# EAGLE board new_board1 (EAGLE 6.4)
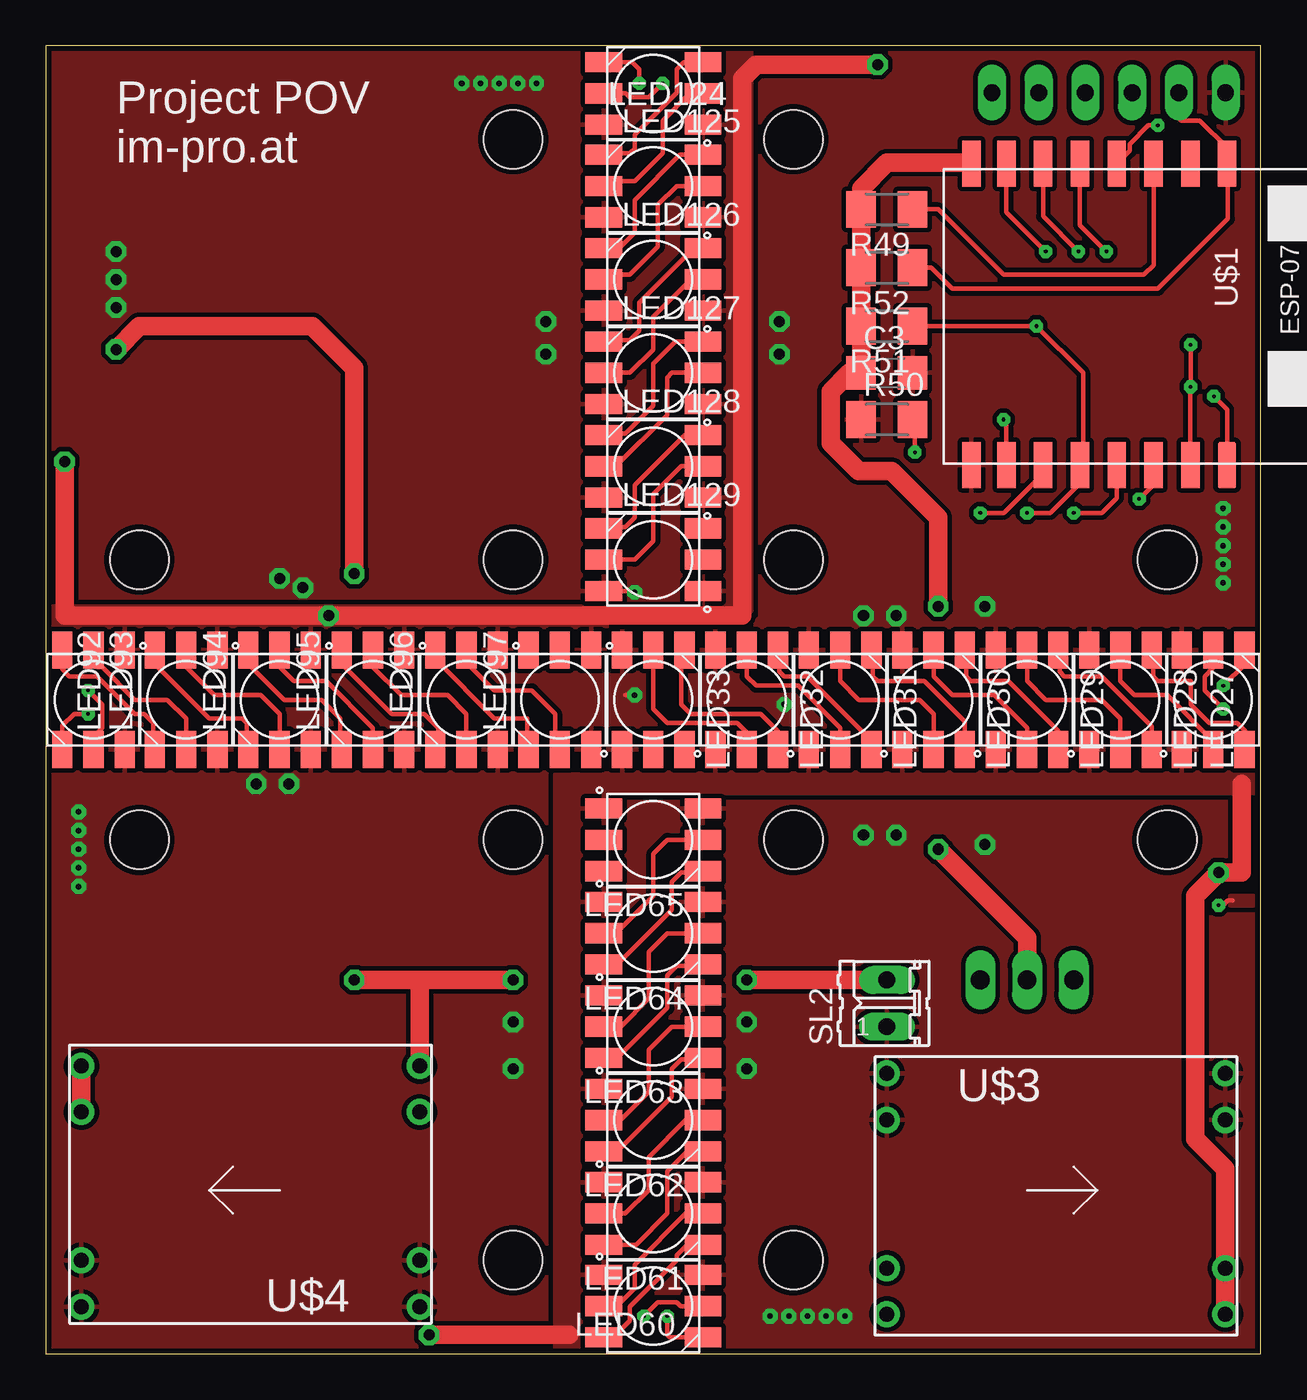
[diagram p0: board, top side]
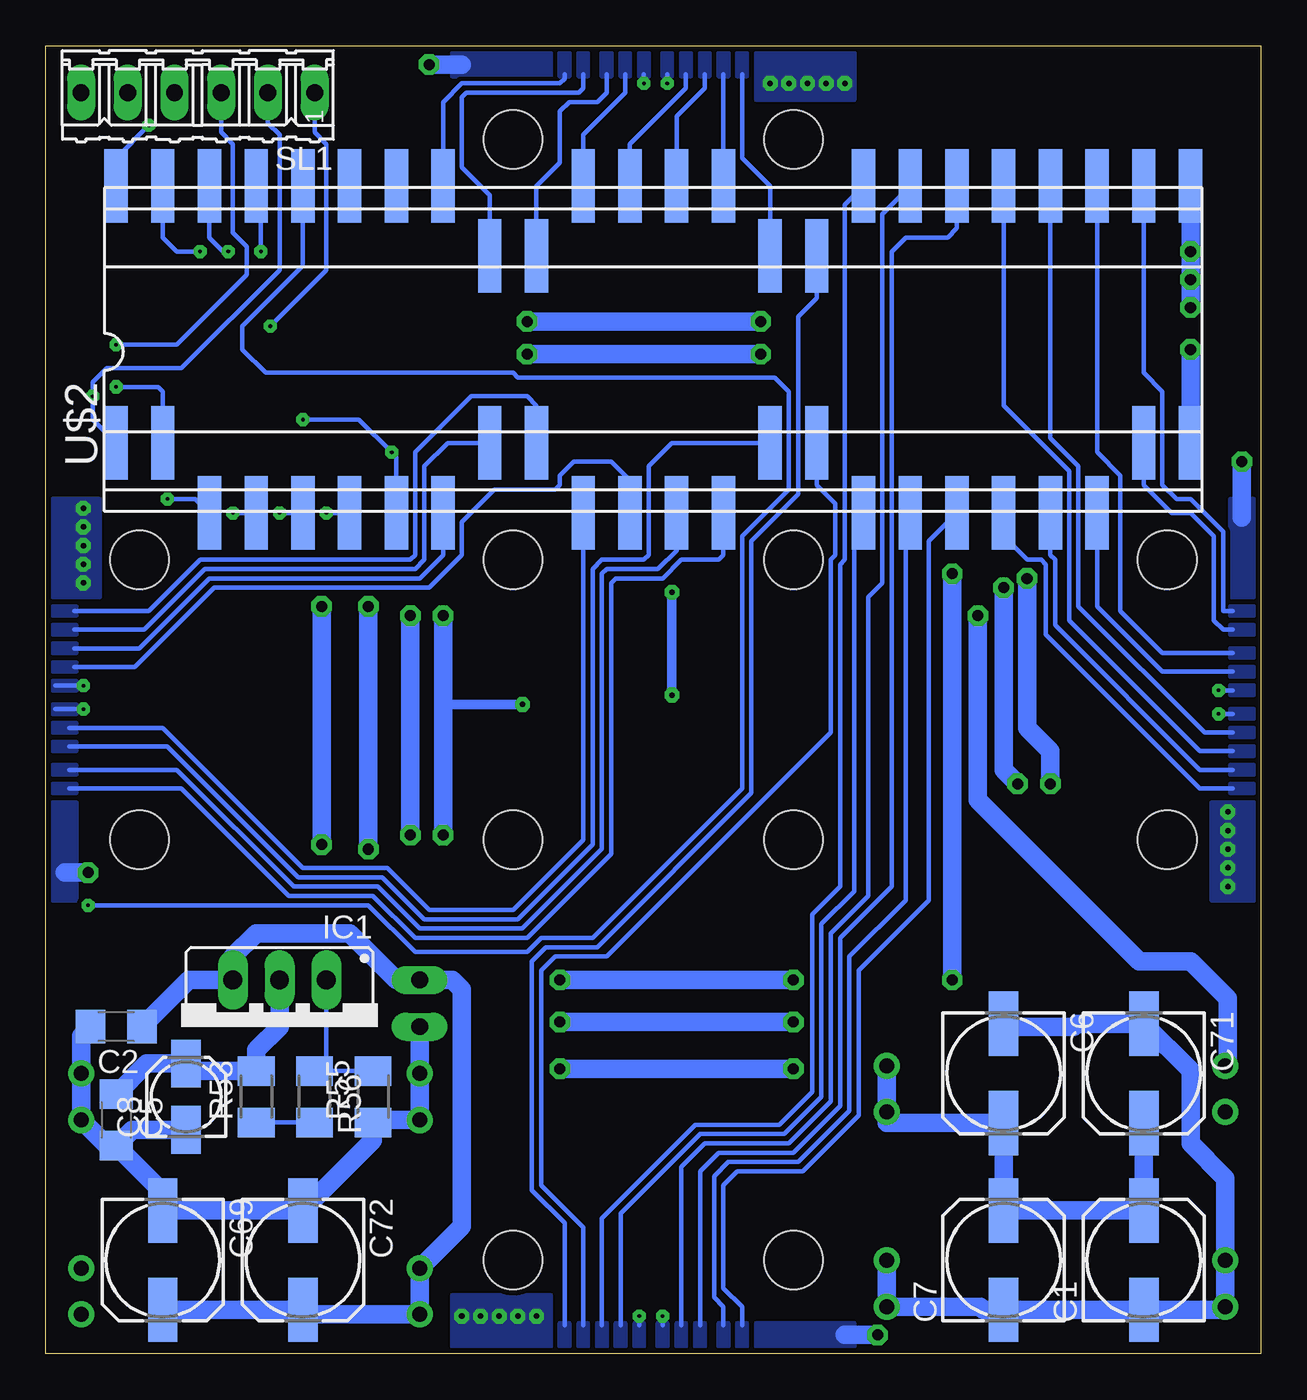
[diagram p1: board, bottom side, seen from below]

Size 66.04 x 71.12 mm. Coordinates in mm from the lower left corner, seen from the top.
Outline: 0,0 66.04,0 66.04,71.12 0,71.12 0,0
Copper layers (1*16): Top 0.035mm / dielectric 1.5mm / Bottom 0.035mm
Design rules "SparkFun *": minimum track width 10mil, minimum drill 0.2mm, track to track 10mil, track to pad 10mil, pad to pad 10mil, via to via 10mil, smd to smd 0mil, copper to edge 0.3mm, drill to drill 10mil, minimum pad ring 12mil, minimum via ring 10mil, stop-mask expansion 4mil, vias tented up to drill 20mil, thermal gap 10mil
Holes 3.2 mm at 25.4,43.18 40.64,43.18 40.64,27.94 25.4,27.94 60.96,43.18 60.96,27.94 5.08,43.18 5.08,27.94 25.4,5.08 40.64,5.08 25.4,66.04 40.64,66.04
tKeepout: area 22.6,25.2 to 28.1,30.7

## Footprints (pad centres in the part's own frame; a part is rotated, then mirrored left to right if it is on the bottom)
153CLV-0605 = smd 3.5 x 1.6: + 2.7,0; - -2.7,0
C1206 = smd 1.6 x 1.8: 1 -1.4,0; 2 1.4,0
153CLV-0405 = smd 2.6 x 1.6: + 1.8,0; - -1.8,0
317TS = drill 1.016 long: 1 -2.54,-2.54; 2 0,-2.54; 3 2.54,-2.54
APA102 = smd 2 x 1.1: CI -2.7,0; CO 2.7,0; DI -2.7,1.7; DO 2.7,1.7; GND -2.7,-1.7; VCC 2.7,-1.7
M1206 = smd 1.6 x 2: 1 -1.4,0; 2 1.4,0
06P = drill 0.914 long: 1 -6.35,0; 2 -3.81,0; 3 -1.27,0; 4 1.27,0; 5 3.81,0; 6 6.35,0
02P = drill 0.914 long: 1 -1.27,0; 2 1.27,0
ESP07-16PIN = smd 2.5 x 1: ADC -8.2,3.8; CH_PD -8.2,1.8; GND 8.2,-8.105; GPIO0 8.2,-2.2; GPIO2 8.2,-4.2; GPIO4 8.2,1.8; GPIO5 8.2,-0.2; GPIO12 -8.2,-4.2; GPIO13 -8.2,-6.2; GPIO14 -8.2,-2.2; GPIO15 8.2,-6.2; GPIO16 -8.2,-0.2; REST -8.2,5.8; RX 8.2,3.8; TX 8.2,5.8; VCC -8.2,-8.105
DIL48 = smd 1.27 x 4: P$1 -29.21,-5.08; P$2 -26.67,-5.08; P$3 -24.13,-8.89; P$4 -21.59,-8.89; P$5 -19.05,-8.89; P$6 -16.51,-8.89; P$7 -13.97,-8.89; P$8 -11.43,-8.89; P$9 -8.89,-5.08; P$10 -6.35,-5.08; P$11 -3.81,-8.89; P$12 -1.27,-8.89; P$13 1.27,-8.89; P$14 3.81,-8.89; P$15 6.35,-5.08; P$16 8.89,-5.08; P$17 11.43,-8.89; P$18 13.97,-8.89; P$19 16.51,-8.89; P$20 19.05,-8.89; P$21 21.59,-8.89; P$22 24.13,-8.89; P$23 26.67,-5.08; P$24 29.21,-5.08; P$25 29.21,8.89; P$26 26.67,8.89; P$27 24.13,8.89; P$28 21.59,8.89; P$29 19.05,8.89; P$30 16.51,8.89; P$31 13.97,8.89; P$32 11.43,8.89; P$33 8.89,5.08; P$34 6.35,5.08; P$35 3.81,8.89; P$36 1.27,8.89; P$37 -1.27,8.89; P$38 -3.81,8.89; P$39 -6.35,5.08; P$40 -8.89,5.08; P$41 -11.43,8.89; P$42 -13.97,8.89; P$43 -16.51,8.89; P$44 -19.05,8.89; P$45 -21.59,8.89; P$46 -24.13,8.89; P$47 -26.67,8.89; P$48 -29.21,8.89
DCDC = drill 0.813: GND1 0,0; GND2 0,-2.54; GND3 18.4,0; GND4 18.4,-2.54; VIN1 0,-10.6; VIN2 0,-13.1; VOUT1 18.4,-10.6; VOUT2 18.4,-13.1

## Placement (x,y rotation side)
C1  [153CLV-0605]  6.35,5.08 90 bottom
C2  [C1206]  62.23,17.78 180 bottom
C3  [C1206]  45.72,53.34 0 top
C5  [C1206]  62.23,12.7 270 bottom
C6  [153CLV-0605]  13.97,15.24 270 bottom
C7  [153CLV-0605]  13.97,5.08 90 bottom
C8  [153CLV-0405]  58.42,13.97 90 bottom
C69  [153CLV-0605]  59.69,5.08 270 bottom
C71  [153CLV-0605]  6.35,15.24 270 bottom
C72  [153CLV-0605]  52.07,5.08 270 bottom
IC1  [317TS]  53.34,17.78 180 bottom
LED27  APA102  [APA102]  63.46,35.56 270 top
LED28  APA102  [APA102]  58.42,35.56 270 top
LED29  APA102  [APA102]  53.34,35.56 270 top
LED30  APA102  [APA102]  48.26,35.56 270 top
LED31  APA102  [APA102]  43.18,35.56 270 top
LED32  APA102  [APA102]  38.1,35.56 270 top
LED33  APA102  [APA102]  33.02,35.56 270 top
LED60  APA102  [APA102]  33.02,2.58 180 top
LED61  APA102  [APA102]  33.02,7.62 180 top
LED62  APA102  [APA102]  33.02,12.7 180 top
LED63  APA102  [APA102]  33.02,17.78 180 top
LED64  APA102  [APA102]  33.02,22.86 180 top
LED65  APA102  [APA102]  33.02,27.94 180 top
LED92  APA102  [APA102]  2.58,35.56 90 top
LED93  APA102  [APA102]  7.62,35.56 90 top
LED94  APA102  [APA102]  12.7,35.56 90 top
LED95  APA102  [APA102]  17.78,35.56 90 top
LED96  APA102  [APA102]  22.86,35.56 90 top
LED97  APA102  [APA102]  27.94,35.56 90 top
LED124  APA102  [APA102]  33.02,68.54 0 top
LED125  APA102  [APA102]  33.02,63.5 0 top
LED126  APA102  [APA102]  33.02,58.42 0 top
LED127  APA102  [APA102]  33.02,53.34 0 top
LED128  APA102  [APA102]  33.02,48.26 0 top
LED129  APA102  [APA102]  33.02,43.18 0 top
R49  10k  [M1206]  45.72,62.23 180 top
R50  10k  [M1206]  45.72,50.8 0 top
R51  10k  [M1206]  45.72,55.88 180 top
R52  10k  [M1206]  45.72,59.05 180 top
R53  120R  [M1206]  54.61,13.97 90 bottom
R55  390R  [M1206]  48.26,13.97 90 bottom
R56  120R  [M1206]  51.44,13.97 270 bottom
SL1  [06P]  57.78,68.58 180 bottom
SL2  [02P]  45.72,19.05 90 top
U$1  ESP07-16PIN  [ESP07-16PIN]  58.42,56.52 270 top
U$2  CMODS6  [DIL48]  33.02,54.61 0 bottom
U$3  DCDC  [DCDC]  45.72,15.24 0 top
U$4  DCDC  [DCDC]  20.32,2.54 180 top

## Library data of the parts
C1-C3 C5-C8 C69 C71 C72 R49-R53 R55 R56 = rcl
IC1 = v-reg
LED27-LED33 LED60-LED65 LED92-LED97 LED124-LED129 = adafruit
SL1 SL2 = con-amp-quick; OC_FARNELL: unknown; OC_NEWARK: unknown
U$1 = esp8266modules; DIMENSIONS: 22.0 x 16.0 mm; PINS: 16; PITCH: 0.078" / 2 mm
U$2-U$4 = main

## Nets
+3V3: C3.1 C5.1 C8.+ IC1.2 R49.2 R51.2 R52.2 R53.2 U$1.VCC
+5V/1: LED27.VCC LED28.VCC LED29.VCC LED30.VCC LED31.VCC LED32.VCC LED33.VCC LED60.VCC LED61.VCC LED62.VCC LED63.VCC LED64.VCC LED65.VCC U$3.VOUT1 U$3.VOUT2
+5V/2: LED92.VCC LED93.VCC LED94.VCC LED95.VCC LED96.VCC LED97.VCC LED124.VCC LED125.VCC LED126.VCC LED127.VCC LED128.VCC LED129.VCC U$4.VOUT1 U$4.VOUT2
+12V: C1.+ C2.1 C6.+ C7.+ C69.+ C71.+ C72.+ IC1.3 SL2.2 U$2.P$24 U$3.VIN1 U$3.VIN2 U$4.VIN1 U$4.VIN2
GA1: U$2.P$8
GA2: U$2.P$9
GA3: U$2.P$10
GA4: U$2.P$11
GA5: U$2.P$12
GA6: U$2.P$13
GA7: U$2.P$14
GA8: U$2.P$15
GB1: U$2.P$33
GB2: U$2.P$32
GB3: U$2.P$31
GB4: U$2.P$30
GB5: U$2.P$16
GB6: U$2.P$17
GB7: U$2.P$18
GB8: U$2.P$19
GC1: U$2.P$29
GC2: U$2.P$28
GC3: U$2.P$27
GC4: U$2.P$26
GC5: U$2.P$20
GC6: U$2.P$21
GC7: U$2.P$22
GC8: U$2.P$23
GD1: U$2.P$41
GD2: U$2.P$40
GD3: U$2.P$39
GD4: U$2.P$38
GD5: U$2.P$37
GD6: U$2.P$36
GD7: U$2.P$35
GD8: U$2.P$34
GND: C1.- C2.2 C3.2 C5.2 C6.- C7.- C8.- C69.- C71.- C72.- LED27.GND LED28.GND LED29.GND LED30.GND LED31.GND LED32.GND LED33.GND LED60.GND LED61.GND LED62.GND LED63.GND LED64.GND LED65.GND LED92.GND LED93.GND LED94.GND LED95.GND LED96.GND LED97.GND LED124.GND LED125.GND LED126.GND LED127.GND LED128.GND LED129.GND R50.1 R55.1 SL1.6 SL2.1 U$1.GND U$2.P$25 U$3.GND1 U$3.GND2 U$3.GND3 U$3.GND4 U$4.GND1 U$4.GND2 U$4.GND3 U$4.GND4
GPIO0: R51.1 SL1.1 U$1.GPIO0 U$2.P$5
GPIO2: U$1.GPIO2 U$2.P$6
GPIO4: U$1.GPIO4 U$2.P$3
GPIO5: U$1.GPIO5 U$2.P$4
GPIO12: U$1.GPIO12 U$2.P$46
GPIO13: U$1.GPIO13 U$2.P$45
GPIO14: U$1.GPIO14 U$2.P$47
GPIO15: R50.2 U$1.GPIO15 U$2.P$7
GPIO16: U$1.GPIO16 U$2.P$48
N$1: U$2.P$44
N$83: R52.1 SL1.5 U$1.REST
N$84: R49.1 U$1.CH_PD
N$109: LED27.DI
N$112: LED27.CI
N$113: LED27.DO LED28.DI
N$114: LED27.CO LED28.CI
N$115: LED28.DO LED29.DI
N$116: IC1.1 R55.2 R56.1
N$117: LED28.CO LED29.CI
N$118: R53.1 R56.2
N$119: LED29.DO LED30.DI
N$120: LED29.CO LED30.CI
N$162: LED30.DO LED31.DI
N$163: LED30.CO LED31.CI
N$164: LED31.DO LED32.DI
N$165: LED31.CO LED32.CI
N$166: LED32.DO LED33.DI
N$167: LED32.CO LED33.CI
N$224: LED60.DI
N$225: LED60.CI
N$226: LED60.DO LED61.DI
N$227: LED60.CO LED61.CI
N$228: LED61.DO LED62.DI
N$229: LED61.CO LED62.CI
N$230: LED62.DO LED63.DI
N$231: LED62.CO LED63.CI
N$232: LED63.DO LED64.DI
N$233: LED63.CO LED64.CI
N$234: LED64.DO LED65.DI
N$235: LED64.CO LED65.CI
N$297: LED92.DI
N$298: LED92.CI
N$299: LED92.DO LED93.DI
N$300: LED92.CO LED93.CI
N$301: LED93.DO LED94.DI
N$302: LED93.CO LED94.CI
N$303: LED94.DO LED95.DI
N$304: LED94.CO LED95.CI
N$305: LED95.DO LED96.DI
N$306: LED95.CO LED96.CI
N$307: LED96.DO LED97.DI
N$308: LED96.CO LED97.CI
N$370: LED124.DI
N$371: LED124.CI
N$372: LED124.DO LED125.DI
N$373: LED124.CO LED125.CI
N$374: LED125.DO LED126.DI
N$375: LED125.CO LED126.CI
N$376: LED126.DO LED127.DI
N$377: LED126.CO LED127.CI
N$378: LED127.DO LED128.DI
N$379: LED127.CO LED128.CI
N$380: LED128.DO LED129.DI
N$381: LED128.CO LED129.CI
RX: SL1.3 U$1.RX U$2.P$2
TX: SL1.2 U$1.TX U$2.P$1

## Tracks (layer width: path | path; a pad name or v marks a point on that pad's centre or on a via)
+3V3  (via drill 0.6)
  Top 1: U$1.VCC 50.26,64.77 45.72,64.77 44.32,63.37 R49.2 R52.2 R51.2 C3.1 43.69,53.34 42.67,52.32 42.67,49.53 44.2,48.01 45.97,48.01 48.51,45.47 v48.51,40.64 | v48.51,27.43 53.34,22.61 IC1.2
  Bottom 1: IC1.2 53.34,17.78 54.61,16.51 R53.2 58.02,15.37 C8.+ 60.56,15.77 C5.1 | v48.51,27.43 v48.51,40.64
+5V/1  (via drill 0.6)
  Top 1: U$3.VOUT2 U$3.VOUT1 64.12,10.05 62.48,11.68 62.48,24.89 v63.75,26.16 65.02,26.16 65.02,30.99 | v20.83,1.02 28.45,1.02
  Bottom 1: v20.83,1.02 22.61,1.02 | 65.02,26.16 v63.75,26.16
  pour Bottom: 65.66,29.97 64.39,29.97 64.39,24.64 65.66,24.64
  pour Bottom: 27.43,0.38 27.43,1.65 22.1,1.65 22.1,0.38
  pour Top: 30.48,33.02 66.04,33.02 66.04,30.48 30.48,30.48
  pour Top: 27.69,0 27.69,31.5 30.48,31.5 30.48,0
+5V/2  (via drill 0.6)
  Top 1: U$4.VOUT1 U$4.VOUT2 | v1.02,48.51 1.02,40.13 37.85,40.13 37.85,69.34 38.61,70.1 v45.21,70.1
  Bottom 1: v1.02,48.51 1.02,45.47 | v45.21,70.1 43.43,70.1 | U$4.VOUT2 1.78,15.78 1.78,19.3 3.81,21.34 6.6,21.34 15.37,30.1 v15.37,40.13
  pour Bottom: 0.38,41.15 1.65,41.15 1.65,46.48 0.38,46.48
  pour Bottom: 38.61,70.74 38.61,69.47 43.94,69.47 43.94,70.74
  pour Top: 30.48,38.35 0,38.35 0,40.64 30.48,40.64
  pour Top: 38.35,70.87 38.35,40.39 35.81,40.39 35.81,70.87
+12V  (via drill 0.6)
  Top 1: v38.1,20.32 SL2.2 | v3.81,54.61 5.08,55.88 14.48,55.88 16.76,53.59 v16.76,42.42 | 20.32,20.32 U$4.VIN2 | 55.63,20.07 IC1.3 | v16.76,20.32 20.32,20.32 | 20.32,20.32 v25.4,20.32
  Bottom 1: C71.+ C1.+ C7.+ C6.+ 20.32,12.54 U$4.VIN1 U$4.VIN2 | v25.4,20.32 v38.1,20.32 | C2.1 58.29,20.32 IC1.3 55.88,21.59 54.61,22.86 49.53,22.86 46.99,20.32 SL2.2 43.94,20.32 43.43,19.81 43.43,6.93 U$3.VIN1 U$3.VIN2 51.83,2.14 C72.+ C69.+ | v16.76,20.32 v16.76,42.42 | v3.81,54.61 U$2.P$24
GA1
  Bottom 0.254: U$2.P$8 44.45,43.43 45.72,42.16 57.15,42.16 60.96,38.35 64.52,38.35
  pour Bottom: 64.39,38.61 65.66,38.61 65.66,38.1 64.39,38.1
GA2
  Bottom 0.254: U$2.P$9 44.2,49.53 45.47,48.26 45.47,43.18 45.97,42.67 57.4,42.67 60.71,39.37 64.52,39.37
  pour Bottom: 64.39,39.62 65.66,39.62 65.66,39.12 64.39,39.12
GA3
  Bottom 0.254: U$2.P$10 39.37,51.56 39.88,52.07 42.93,52.07 45.97,49.02 45.97,43.43 46.23,43.18 57.66,43.18 60.45,40.39 64.52,40.39
  pour Bottom: 64.39,40.64 65.66,40.64 65.66,40.13 64.39,40.13
GA4
  Bottom 0.254: U$2.P$11 36.83,27.94 40.64,24.13 45.21,24.13 47.5,26.42 52.07,26.42 59.69,34.04 64.77,34.04
  pour Bottom: 64.39,34.29 65.66,34.29 65.66,33.78 64.39,33.78
GA5
  Bottom 0.254: U$2.P$12 34.29,47.5 35.31,48.51 37.34,48.51 38.1,47.75 38.1,47.24 38.35,46.99 41.66,46.99 43.43,45.21 43.43,43.43 45.21,41.66 56.9,41.66 61.21,37.34 64.52,37.34
  pour Bottom: 64.39,37.59 65.66,37.59 65.66,37.08 64.39,37.08
GA6
  Bottom 0.254: 64.77,31.75 58.93,31.75 52.58,25.4 48.01,25.4 45.72,23.11 40.13,23.11 35.81,27.43 35.81,42.42 35.56,42.67 32.77,42.67 31.75,43.69 U$2.P$13
  pour Bottom: 64.39,32 65.66,32 65.66,31.5 64.39,31.5
GA7
  Bottom 0.254: 64.77,30.73 58.67,30.73 52.83,24.89 48.26,24.89 45.97,22.61 39.88,22.61 35.31,27.18 35.31,41.91 35.05,42.16 32.51,42.16 31.5,43.18 29.46,43.18 29.21,43.43 U$2.P$14
  pour Bottom: 64.39,30.99 65.66,30.99 65.66,30.48 64.39,30.48
GA8
  Bottom 0.254: U$2.P$15 32,49.53 33.27,48.26 33.27,43.43 33.53,43.18 35.81,43.18 36.32,42.67 36.32,27.69 40.39,23.62 45.47,23.62 47.75,25.91 52.32,25.91 59.44,33.02 64.77,33.02
  pour Bottom: 64.39,33.27 65.66,33.27 65.66,32.77 64.39,32.77
GB1
  Bottom 0.254: 37.85,1.52 37.85,7.11 39.62,8.89 39.62,21.34 38.86,22.1 36.07,22.1 27.69,30.48 27.69,44.2 25.15,46.74 25.15,56.39 24.13,57.4 24.13,58.93 24.51,59.31 U$2.P$33
  pour Bottom: 38.1,1.65 38.1,0.38 37.59,0.38 37.59,1.65
GB2
  Bottom 0.254: U$2.P$32 22.61,62.48 22.61,43.18 22.86,42.93 22.86,25.4 24.38,23.88 24.38,14.22 26.16,12.45 30.73,12.45 35.81,7.37 35.81,1.52
  pour Bottom: 36.07,1.65 36.07,0.38 35.56,0.38 35.56,1.65
GB3
  Bottom 0.254: U$2.P$31 20.57,61.98 20.57,41.91 21.34,41.15 21.34,24.89 23.37,22.86 23.37,13.72 25.65,11.43 30.23,11.43 31.5,10.16 31.5,1.52
  pour Bottom: 31.75,1.65 31.75,0.38 31.24,0.38 31.24,1.65
GB4
  Bottom 0.254: 30.48,1.52 30.48,9.91 29.46,10.92 25.4,10.92 22.86,13.46 22.86,22.61 20.07,25.4 20.07,59.94 19.3,60.71 17.02,60.71 16.51,61.21 U$2.P$30
  pour Bottom: 30.73,1.65 30.73,0.38 30.23,0.38 30.23,1.65
GB5
  Bottom 0.254: 36.83,1.52 36.83,6.86 39.12,9.14 39.12,20.83 38.35,21.59 35.56,21.59 23.37,33.78 23.37,43.18 23.11,43.43 23.11,46.23 24.13,47.24 U$2.P$16
  pour Bottom: 37.08,1.65 37.08,0.38 36.58,0.38 36.58,1.65
GB6
  Bottom 0.254: U$2.P$17 22.1,45.21 22.1,25.15 23.88,23.37 23.88,13.97 25.91,11.94 30.48,11.94 34.8,7.62 34.8,1.52
  pour Bottom: 35.05,1.65 35.05,0.38 34.54,0.38 34.54,1.65
GB7
  Bottom 0.254: U$2.P$18 19.3,45.47 19.3,24.64 22.35,21.59 22.35,13.21 25.15,10.41 28.96,10.41 29.72,9.65 29.72,3.05 29.21,2.54 29.21,1.52
  pour Bottom: 29.46,1.65 29.46,0.38 28.96,0.38 28.96,1.65
GB8
  Bottom 0.254: U$2.P$19 18.03,44.2 18.03,24.64 21.84,20.83 21.84,12.95 24.89,9.91 28.45,9.91 29.21,9.14 29.21,3.56 28.19,2.54 28.19,1.52
  pour Bottom: 28.45,1.65 28.45,0.38 27.94,0.38 27.94,1.65
GC1
  Bottom 0.254: U$2.P$29 13.97,51.56 10.41,48.01 10.41,39.88 3.3,32.77 1.52,32.77
  pour Bottom: 1.65,32.51 0.38,32.51 0.38,33.02 1.65,33.02
GC2
  Bottom 0.254: U$2.P$28 11.43,49.78 9.91,48.26 9.91,40.64 3.05,33.78 1.52,33.78
  pour Bottom: 1.65,33.53 0.38,33.53 0.38,34.04 1.65,34.04
GC3
  Bottom 0.254: U$2.P$27 8.89,49.02 7.62,47.75 7.62,40.39 5.33,38.1 1.52,38.1
  pour Bottom: 1.65,37.85 0.38,37.85 0.38,38.35 1.65,38.35
GC4
  Bottom 0.254: U$2.P$26 6.35,53.34 5.33,52.32 5.33,47.24 4.57,46.48 3.81,46.48 2.03,44.7 2.03,40.39 1.52,40.39
  pour Bottom: 1.65,40.13 0.38,40.13 0.38,40.64 1.65,40.64
GC5
  Bottom 0.254: U$2.P$20 13.97,44.45 12.7,43.18 11.94,43.18 11.68,42.93 11.68,39.12 3.3,30.73 1.52,30.73
  pour Bottom: 1.65,30.48 0.38,30.48 0.38,30.99 1.65,30.99
GC6
  Bottom 0.254: U$2.P$21 11.43,43.43 11.18,43.18 11.18,39.62 3.3,31.75 1.52,31.75
  pour Bottom: 1.65,31.5 0.38,31.5 0.38,32 1.65,32
GC7
  Bottom 0.254: U$2.P$22 8.89,40.64 5.33,37.08 1.52,37.08
  pour Bottom: 1.65,36.83 0.38,36.83 0.38,37.34 1.65,37.34
GC8
  Bottom 0.254: U$2.P$23 6.35,47.24 4.83,45.72 3.81,45.72 2.54,44.45 2.54,39.88 2.03,39.37 1.52,39.37
  pour Bottom: 1.65,39.12 0.38,39.12 0.38,39.62 1.65,39.62
GD1
  Bottom 0.254: U$2.P$41 44.45,68.07 43.43,69.09 38.1,69.09 37.85,69.34 37.85,69.6
  pour Bottom: 37.59,69.47 37.59,70.74 38.1,70.74 38.1,69.47
GD2
  Bottom 0.254: U$2.P$40 41.91,62.99 43.43,64.52 43.43,68.33 43.18,68.58 37.08,68.58 36.83,68.83 36.83,69.6
  pour Bottom: 36.58,69.47 36.58,70.74 37.08,70.74 37.08,69.47
GD3
  Bottom 0.254: U$2.P$39 39.37,63.5 38.1,64.77 38.1,67.56 37.59,68.07 36.07,68.07 35.56,68.58 35.56,69.6
  pour Bottom: 35.31,69.47 35.31,70.74 35.81,70.74 35.81,69.47
GD4
  Bottom 0.254: U$2.P$38 36.83,66.29 34.54,68.58 34.54,69.6
  pour Bottom: 34.29,69.47 34.29,70.74 34.8,70.74 34.8,69.47
GD5
  Bottom 0.254: U$2.P$37 34.29,65.79 31.24,68.83 31.24,69.6
  pour Bottom: 30.99,69.47 30.99,70.74 31.5,70.74 31.5,69.47
GD6
  Bottom 0.254: U$2.P$36 31.75,67.31 30.23,68.83 30.23,69.6
  pour Bottom: 29.97,69.47 29.97,70.74 30.48,70.74 30.48,69.47
GD7
  Bottom 0.254: U$2.P$35 29.21,69.6
  pour Bottom: 28.96,69.47 28.96,70.74 29.46,70.74 29.46,69.47
GD8
  Bottom 0.254: U$2.P$34 26.67,63.5 28.19,65.02 28.19,69.6
  pour Bottom: 27.94,69.47 27.94,70.74 28.45,70.74 28.45,69.47
GND  (via drill 0.3, 0.6)
  Top 0.254: C3.2 46.86,53.34 | LED129.GND 31.93,41.48 v32,41.4 | v32,35.81 31.5,35.81
  Bottom 0.508: v32,41.4 v32,35.81 | v40.13,35.31 44.2,35.31 44.45,35.56
  Bottom 1: 6.19,2.54 C1.- | C1.- C7.- 15.08,2.38 15.24,2.54 U$4.GND1 U$4.GND2 | C5.2 59.69,8.76 C69.- C72.- 48.26,11.59 R55.1 48.13,12.7 U$3.GND2 U$3.GND1 SL2.1 | C5.2 62.72,11.3 U$3.GND4 U$3.GND3 64.12,17.29 C2.2 | C8.- 61.36,12.17 C5.2 | U$2.P$25 v3.81,58.42 v3.81,56.9 | v25.4,15.49 v38.1,15.49 | v25.4,18.03 v38.1,18.03 | v44.45,40.13 44.45,35.56 v44.45,28.19 | C1.- 2.08,2.38 U$4.GND3 U$4.GND4 1.92,9.54 3.81,11.43 3.81,15.4 C71.- 10,17.94 10.16,17.78 13.81,17.78 C6.- | v51.05,40.64 v51.05,27.69 | v46.23,40.13 v46.23,28.19 | v12.7,42.16 12.7,34.04 11.43,32.77 v11.43,30.99 | v13.97,41.66 13.97,31.75 v13.21,30.99 | v39.88,56.13 v27.18,56.13 | v27.18,54.36 v39.88,54.36
  other vias: 64.01,45.97 64.01,44.96 64.01,43.94 64.01,42.93 64.01,41.91 43.43,2.03 42.42,2.03 41.4,2.03 40.39,2.03 39.37,2.03 1.78,25.4 1.78,26.42 1.78,27.43 1.78,28.45 1.78,29.46 22.61,69.09 23.62,69.09 24.64,69.09 25.65,69.09 26.67,69.09 3.81,59.94
  pour Top (rank 3): 66.04,71.12 66.04,0 0,0 0,71.12
  pour Bottom: 65.66,41.15 63.12,41.15 63.12,46.48 65.66,46.48
  pour Bottom: 38.61,0.38 38.61,3.17 43.94,3.17 43.94,0.38
  pour Bottom: 0.38,29.97 2.67,29.97 2.67,24.64 0.38,24.64
  pour Bottom: 27.43,70.74 27.43,68.2 22.1,68.2 22.1,70.74
GPIO0  (via drill 0.2)
  Top 0.254: v53.34,45.72 54.61,45.72 56.22,47.33 U$1.GPIO0 56.39,48.48 56.39,53.34 v53.85,55.88 R51.1
  Bottom 0.254: v53.34,45.72 U$2.P$5 | SL1.1 51.44,66.42 50.8,65.79 50.8,58.93 v53.85,55.88
GPIO2  (via drill 0.2)
  Top 0.254: U$1.GPIO2 54.22,47.87 52.07,45.72 v50.8,45.72
  Bottom 0.254: v50.8,45.72 U$2.P$6
GPIO4  (via drill 0.2)
  Top 0.254: U$1.GPIO4 60.22,47.27 v59.44,46.48
  Bottom 0.254: v59.44,46.48 57.91,46.48 U$2.P$3
GPIO5  (via drill 0.2)
  Top 0.254: U$1.GPIO5 58.22,46.54 57.4,45.72 v55.88,45.72
  Bottom 0.254: v55.88,45.72 U$2.P$4
GPIO12  (via drill 0.2)
  Top 0.254: U$1.GPIO12 54.22,61.86 v56.13,59.94
  Bottom 0.254: v56.13,59.94 56.39,59.94 57.15,60.71 U$2.P$46
GPIO13  (via drill 0.2)
  Top 0.254: U$1.GPIO13 52.22,62.08 v54.36,59.94
  Bottom 0.254: v54.36,59.94 54.36,63.25 U$2.P$45
GPIO14  (via drill 0.2)
  Top 0.254: U$1.GPIO14 56.22,61.38 v57.66,59.94
  Bottom 0.254: v57.66,59.94 58.93,59.94 59.69,60.71 U$2.P$47
GPIO15  (via drill 0.2)
  Top 0.254: R50.2 47.24,50.68 v47.24,49.02 | v52.07,50.8 52.22,50.65 U$1.GPIO15
  Bottom 0.254: U$2.P$7 46.99,48.77 v47.24,49.02 49.02,50.8 v52.07,50.8
GPIO16  (via drill 0.2)
  Top 0.254: v60.45,66.8 59.94,66.8 58.93,65.79 58.93,65.42 U$1.GPIO16
  Bottom 0.254: U$2.P$48 62.23,65.02 v60.45,66.8
N$1  (via drill 0.2)
  Top 0.254: v63.75,24.38 64.01,24.38 64.26,24.64 64.52,24.64
  Bottom 0.254: U$2.P$44 52.07,59.18 55.37,55.88 55.37,54.61 54.1,53.34 40.64,53.34 40.39,53.09 26.42,53.09 25.65,52.32 25.65,46.99 28.19,44.45 28.19,30.73 36.32,22.61 39.12,22.61 39.88,21.84 45.97,21.84 48.51,24.38 v63.75,24.38
  pour Top: 65.66,24.38 64.39,24.38 64.39,24.89 65.66,24.89
N$83
  Top 0.254: SL1.5 61.47,68.45 61.47,67.31 61.72,67.06 62.74,67.06 64.22,65.57 U$1.REST 64.26,64.67 64.26,61.72 60.45,57.91 49.28,57.91 48.13,59.05 R52.1
N$84
  Top 0.254: U$1.CH_PD 60.22,59.2 59.69,58.67 52.07,58.67 48.51,62.23 R49.1
N$109  (via drill 0.2)
  Top 0.254: LED27.DI 65.2,37.51 v64.01,36.32
  Bottom 0.254: v64.01,36.32 65.53,36.32
  pour Bottom: 64.39,36.58 65.66,36.58 65.66,36.07 64.39,36.07
N$112  (via drill 0.2)
  Top 0.254: LED27.CI 63.5,37.34 62.99,36.83 62.99,36.07 v64.01,35.05
  Bottom 0.254: v64.01,35.05 65.53,35.05
  pour Bottom: 64.39,35.31 65.66,35.31 65.66,34.8 64.39,34.8
N$113
  Top 0.254: LED27.DO 65.2,33.86 64.77,34.29 63.25,34.29 62.23,35.31 62.23,36.58 60.45,36.58 60.2,36.83 60.2,38.18 LED28.DI
N$114
  Top 0.254: LED28.CI 58.42,36.58 59.18,35.81 60.96,35.81 63.5,33.27 LED27.CO
N$115
  Top 0.254: LED28.DO 60.12,34.11 57.4,36.83 55.37,36.83 55.12,37.08 55.12,38.18 LED29.DI
N$116
  Bottom 0.254: IC1.1 50.8,16 R56.1 R55.2
N$117
  Top 0.254: LED28.CO 58.42,34.54 57.4,35.56 54.36,35.56 53.34,36.58 LED29.CI
N$118
  Bottom 0.254: R56.2 R53.1
N$119
  Top 0.254: LED29.DO 55.04,33.86 52.32,36.58 50.29,36.58 50.04,36.83 50.04,38.18 LED30.DI
N$120
  Top 0.254: LED29.CO 53.34,34.04 51.56,35.81 49.28,35.81 48.26,36.83 LED30.CI
N$162
  Top 0.254: LED30.DO 49.96,34.37 47.75,36.58 45.21,36.58 44.96,36.83 44.96,38.18 LED31.DI
N$163
  Top 0.254: LED30.CO 48.26,34.8 47.5,35.56 44.2,35.56 43.18,36.58 LED31.CI
N$164
  Top 0.254: LED31.DO 44.88,33.35 41.4,36.83 40.13,36.83 39.88,37.08 39.88,38.18 LED32.DI
N$165
  Top 0.254: LED31.CO 43.18,34.04 40.89,36.32 38.61,36.32 38.1,36.83 LED32.CI
N$166
  Top 0.254: LED33.DI 34.54,38.08 34.54,35.31 35.05,34.8 38.86,34.8 39.8,33.86 LED32.DO
N$167
  Top 0.254: LED33.CI 33.02,35.05 33.78,34.29 37.59,34.29 38.1,33.78 LED32.CO
N$224  (via drill 0.2)
  Top 0.254: LED60.DI 33.92,0.88 33.78,1.02 v33.78,2.03
  Bottom 0.254: v33.78,2.03 33.78,1.52
  pour Bottom: 34.04,1.65 34.04,0.38 33.53,0.38 33.53,1.65
N$225  (via drill 0.2)
  Top 0.254: LED60.CI 34.5,2.58 34.29,2.79 33.27,2.79 v32.51,2.03
  Bottom 0.254: v32.51,2.03 32.51,1.52
  pour Bottom: 32.77,1.65 32.77,0.38 32.26,0.38 32.26,1.65
N$226
  Top 0.254: LED60.DO 30.85,0.88 31.75,1.78 31.75,2.54 34.29,5.08 34.29,5.33 34.8,5.84 35.64,5.84 LED61.DI
N$227
  Top 0.254: LED60.CO 31.03,2.58 32,3.56 32,4.83 34.8,7.62 LED61.CI
N$228
  Top 0.254: LED61.DO 32.08,5.92 33.78,7.62 33.78,9.91 34.8,10.92 35.64,10.92 LED62.DI
N$229
  Top 0.254: LED61.CO 31.5,7.62 32.77,8.89 32.77,10.67 34.8,12.7 LED62.CI
N$230
  Top 0.254: LED62.DO 31.07,11 34.04,13.97 34.04,15.49 34.54,16 35.64,16 LED63.DI
N$231
  Top 0.254: LED62.CO 31.24,12.7 32.77,14.22 32.77,16.51 34.04,17.78 LED63.CI
N$232
  Top 0.254: LED63.DO 31.07,16.08 33.78,18.8 33.78,20.57 34.29,21.08 35.64,21.08 LED64.DI
N$233
  Top 0.254: LED63.CO 31.24,17.78 32.77,19.3 32.77,21.84 33.78,22.86 LED64.CI
N$234
  Top 0.254: LED64.DO 31.07,21.16 34.04,24.13 34.04,25.65 34.54,26.16 35.64,26.16 LED65.DI
N$235
  Top 0.254: LED64.CO 30.99,22.86 33.02,24.89 33.02,27.18 33.78,27.94 LED65.CI
N$297  (via drill 0.2)
  Top 0.254: LED92.DI 0.88,34.15 1.52,34.8 v2.29,34.8
  Bottom 0.254: v2.29,34.8 1.52,34.8
  pour Bottom: 1.65,34.54 0.38,34.54 0.38,35.05 1.65,35.05
N$298  (via drill 0.2)
  Top 0.254: v2.29,36.07 3.05,35.31 3.05,34.04 2.58,33.57 LED92.CI
  Bottom 0.254: v2.29,36.07 1.52,36.07
  pour Bottom: 1.65,35.81 0.38,35.81 0.38,36.32 1.65,36.32
N$299
  Top 0.254: LED92.DO 0.88,37.22 1.27,36.83 2.79,36.83 4.83,34.8 5.33,34.8 5.84,34.29 5.84,32.94 LED93.DI
N$300
  Top 0.254: LED92.CO 2.58,37.55 2.79,37.34 3.05,37.34 4.83,35.56 6.6,35.56 7.62,34.54 LED93.CI
N$301
  Top 0.254: LED93.DO 5.92,37.51 8.89,34.54 10.67,34.54 10.92,34.29 10.92,32.94 LED94.DI
N$302
  Top 0.254: LED93.CO 7.62,37.34 9.14,35.81 11.68,35.81 12.7,34.8 LED94.CI
N$303
  Top 0.254: LED94.DO 11,37.51 12.95,35.56 14.99,35.56 16,34.54 16,32.94 LED95.DI
N$304
  Top 0.254: LED94.CO 12.7,37.34 13.46,36.58 15.24,36.58 17.78,34.04 LED95.CI
N$305
  Top 0.254: LED95.DO 16.08,37.51 18.8,34.8 20.57,34.8 21.34,34.04 21.34,33.04 LED96.DI
N$306
  Top 0.254: LED95.CO 17.78,37.34 19.3,35.81 21.84,35.81 22.86,34.8 LED96.CI
N$307
  Top 0.254: LED96.DO 21.16,37.77 24.38,34.54 26.16,34.54 26.16,32.94 LED97.DI
N$308
  Top 0.254: LED96.CO 22.86,37.59 24.38,36.07 26.42,36.07 27.69,34.8 27.69,33.11 LED97.CI
N$370  (via drill 0.2)
  Top 0.254: LED124.DI 31.87,70.24 32.26,69.85 v32.26,69.09
  Bottom 0.254: v32.26,69.09 32.26,69.6
  pour Bottom: 32,69.47 32,70.74 32.51,70.74 32.51,69.47
N$371  (via drill 0.2)
  Top 0.254: LED124.CI 31.54,68.54 31.75,68.33 32.77,68.33 v33.53,69.09
  Bottom 0.254: v33.53,69.09 33.53,69.6
  pour Bottom: 33.27,69.47 33.27,70.74 33.78,70.74 33.78,69.47
N$372
  Top 0.254: LED124.DO 34.68,70.24 34.29,69.85 34.29,68.58 32,66.29 32,65.53 31.75,65.28 30.4,65.28 LED125.DI
N$373
  Top 0.254: LED124.CO 35.01,68.54 33.53,67.06 33.53,65.28 32,63.75 30.57,63.75 LED125.CI
N$374
  Top 0.254: LED125.DO 34.47,65.2 32,62.74 32,60.96 30.99,59.94 30.5,59.94 LED126.DI
N$375
  Top 0.254: LED125.CO 34.29,63.5 33.27,62.48 33.27,60.2 31.75,58.67 30.57,58.67 LED126.CI
N$376
  Top 0.254: LED126.DO 35.23,60.12 32.26,57.15 32.26,55.63 31.75,55.12 30.4,55.12 LED127.DI
N$377
  Top 0.254: LED126.CO 35.05,58.42 33.02,56.39 33.02,54.61 31.75,53.34 LED127.CI
N$378
  Top 0.254: LED127.DO 34.21,55.04 33.02,53.85 33.02,51.56 31.5,50.04 30.4,50.04 LED128.DI
N$379
  Top 0.254: LED127.CO 34.04,53.34 33.78,53.09 33.78,51.05 30.99,48.26 LED128.CI
N$380
  Top 0.254: LED128.DO 34.72,49.96 32,47.24 32,45.47 31.5,44.96 30.4,44.96 LED129.DI
N$381
  Top 0.254: LED128.CO 34.54,48.26 33.02,46.74 33.02,44.2 32,43.18 LED129.CI
RX  (via drill 0.2)
  Top 0.254: U$1.RX 62.22,52.57 v62.23,52.58 v62.23,54.86
  Bottom 0.254: v62.23,52.58 59.94,52.58 59.69,52.32 U$2.P$2 | SL1.3 56.52,66.42 55.88,65.79 55.88,60.96 55.12,60.2 55.12,58.67 58.93,54.86 v62.23,54.86
TX  (via drill 0.2)
  Top 0.254: U$1.TX 64.22,51.35 v63.5,52.07
  Bottom 0.254: U$2.P$1 63.5,50.8 v63.5,52.07 63.5,52.83 62.74,53.59 58.67,53.59 53.34,58.93 53.34,66.29 53.98,66.93 SL1.2

## Text on the board
tSilk: Project POV / im-pro.at